# EAGLE board mainboard (EAGLE 7.4.0)
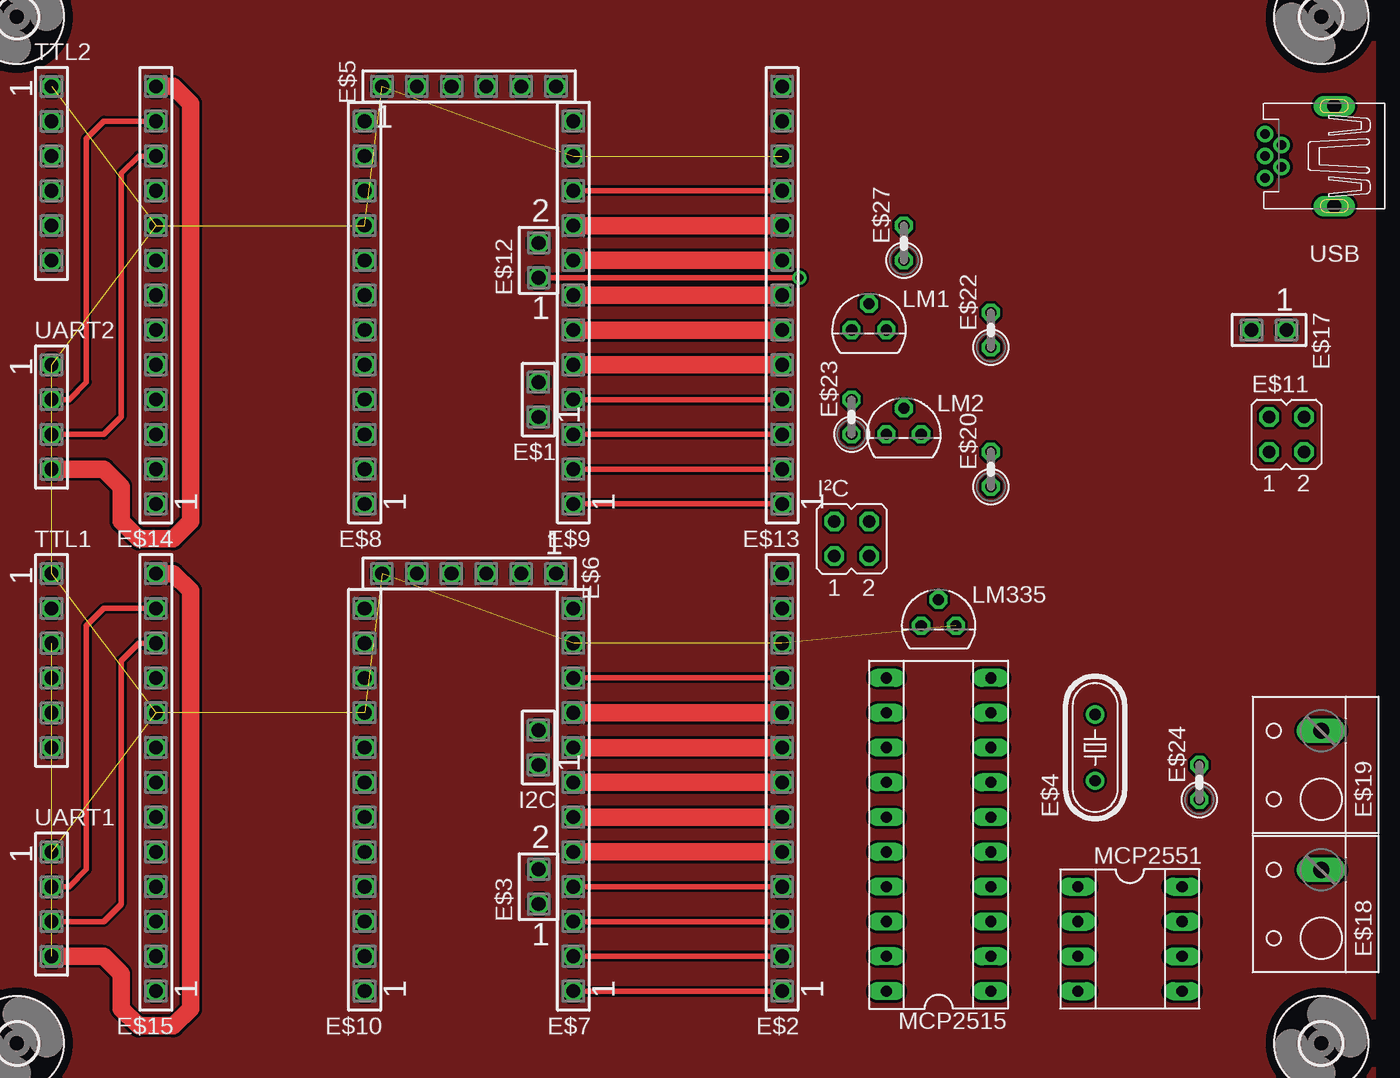
[diagram p0: board, top side]
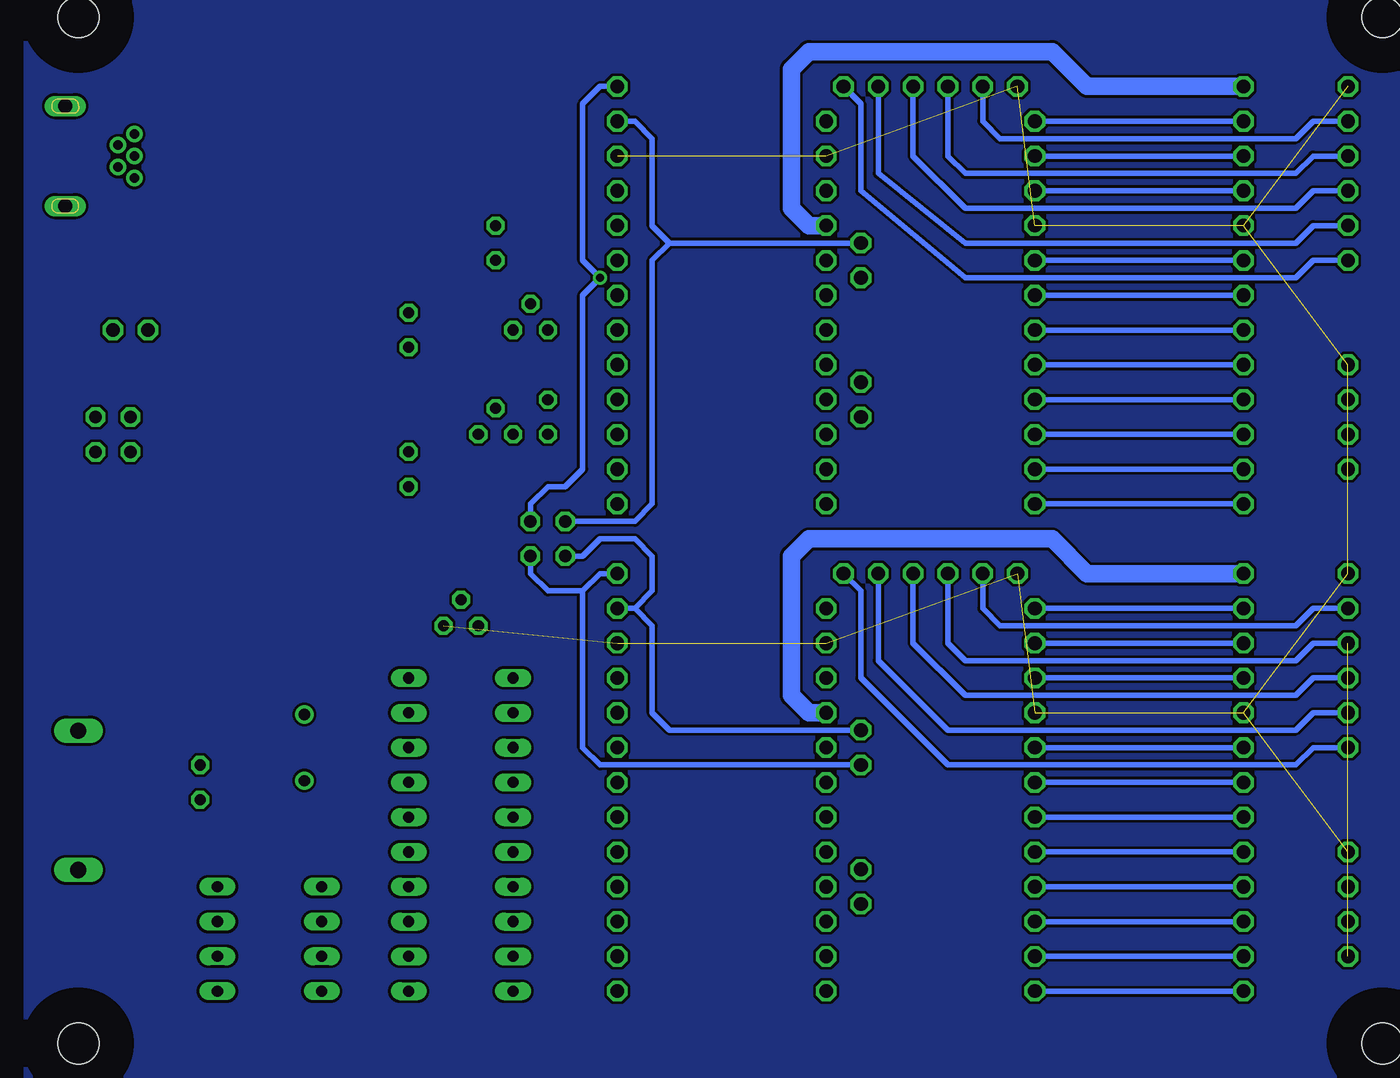
[diagram p1: board, bottom side, seen from below]

No outline drawn. Coordinates in mm, seen from the top.
Copper layers (1*16): Top 0.035mm / dielectric 1.5mm / Bottom 0.035mm
Design rules "default": minimum track width 10mil, minimum drill 24mil, track to track 8mil, track to pad 8mil, pad to pad 8mil, via to via 8mil, smd to smd 8mil, copper to edge 40mil, drill to drill 8mil, minimum pad ring 10mil, minimum via ring 8mil, stop-mask expansion 4mil, vias tented up to drill 0mil, thermal gap 10mil

## Footprints (pad centres in the part's own frame; a part is rotated, then mirrored left to right if it is on the bottom)
SSW-102-02-S-S = drill 1 pad 1.5 octagon: 1 -1.27,0; 2 1.27,0
SSW-113-02-S-S = drill 1 pad 1.5 octagon: 1 -15.24,0; 2 -12.7,0; 3 -10.16,0; 4 -7.62,0; 5 -5.08,0; 6 -2.54,0; 7 0,0; 8 2.54,0; 9 5.08,0; 10 7.62,0; 11 10.16,0; 12 12.7,0; 13 15.24,0
SSW-101-02-S-D = drill 1 pad 1.5 octagon: 1 0,-1.27; 2 0,1.27
HC49/S = drill 0.813: 1 -2.413,0; 2 2.413,0
SSW-106-02-S-S = drill 1 pad 1.5 octagon: 1 -6.35,0; 2 -3.81,0; 3 -1.27,0; 4 1.27,0; 5 3.81,0; 6 6.35,0
SSW-112-02-S-S = drill 1 pad 1.5 octagon: 1 -13.97,0; 2 -11.43,0; 3 -8.89,0; 4 -6.35,0; 5 -3.81,0; 6 -1.27,0; 7 1.27,0; 8 3.81,0; 9 6.35,0; 10 8.89,0; 11 11.43,0; 12 13.97,0
JP2Q = drill 0.914 octagon: 1 -1.27,-1.27; 2 1.27,-1.27; 3 -1.27,1.27; 4 1.27,1.27
3,0 = hole 3: 0,0
W237-112 = drill 1.194 long: 1 2.5,-1.27
0207/2V = drill 0.813 octagon: 1 -1.27,0; 2 1.27,0
TO92 = drill 0.813 pad 1.27 octagon: 1 -1.27,0; 2 0,1.905; 3 1.27,0
SOCKET-20 = drill 0.813 long: 1 -11.43,-3.81; 2 -8.89,-3.81; 3 -6.35,-3.81; 4 -3.81,-3.81; 5 -1.27,-3.81; 6 1.27,-3.81; 7 3.81,-3.81; 8 6.35,-3.81; 9 8.89,-3.81; 10 11.43,-3.81; 11 11.43,3.81; 12 8.89,3.81; 13 6.35,3.81; 14 3.81,3.81; 15 1.27,3.81; 16 -1.27,3.81; 17 -3.81,3.81; 18 -6.35,3.81; 19 -8.89,3.81; 20 -11.43,3.81
SOCKET-08 = drill 0.813 long: 1 -3.81,-3.81; 2 -1.27,-3.81; 3 1.27,-3.81; 4 3.81,-3.81; 5 3.81,3.81; 6 1.27,3.81; 7 -1.27,3.81; 8 -3.81,3.81
SSW-104-02-S-S = drill 1 pad 1.5 octagon: 1 -3.81,0; 2 -1.27,0; 3 1.27,0; 4 3.81,0
32005-601 = drill 0.7 pad 1.016: 1 2.825,1.6; 2 1.625,0.8; 3 2.825,0; 4 1.625,-0.8; 5 2.825,-1.6 | drill 1 pad 1.422 long: M1 -2.225,3.65; M2 -2.225,-3.65

## Placement (x,y rotation side)
E$1  [SSW-102-02-S-S]  41.91,50.8 90 top
E$2  [SSW-113-02-S-S]  59.69,22.86 90 top
E$3  [SSW-101-02-S-D]  41.91,15.24 0 top
E$4  16MHz  [HC49/S]  82.55,25.4 90 top
E$5  [SSW-106-02-S-S]  36.83,73.66 0 top
E$6  [SSW-106-02-S-S]  36.83,38.1 180 top
E$7  [SSW-112-02-S-S]  44.45,21.59 90 top
E$8  [SSW-112-02-S-S]  29.21,57.15 90 top
E$9  [SSW-112-02-S-S]  44.45,57.15 90 top
E$10  [SSW-112-02-S-S]  29.21,21.59 90 top
E$11  [JP2Q]  96.52,48.26 0 top
E$12  [SSW-101-02-S-D]  41.91,60.96 0 top
E$13  [SSW-113-02-S-S]  59.69,58.42 90 top
E$14  [SSW-113-02-S-S]  13.97,58.42 90 top
E$15  [SSW-113-02-S-S]  13.97,22.86 90 top
E$16  [3,0]  3.81,3.81 0 top
E$17  [SSW-102-02-S-S]  95.25,55.88 180 top
E$18  [W237-112]  97.79,13.97 90 top
E$19  [W237-112]  97.79,24.13 90 top
E$20  120R  [0207/2V]  74.93,45.72 90 top
E$21  [3,0]  3.81,78.74 0 top
E$22  120R  [0207/2V]  74.93,55.88 90 top
E$23  120R  [0207/2V]  64.77,49.53 90 top
E$24  120R  [0207/2V]  90.17,22.86 90 top
E$25  [3,0]  99.06,78.74 0 top
E$26  [3,0]  99.06,3.81 0 top
E$27  120R  [0207/2V]  68.58,62.23 90 top
I2C  [SSW-102-02-S-S]  41.91,25.4 90 top
I²C  [JP2Q]  64.77,40.64 0 top
LM1  [TO92]  66.04,55.88 0 top
LM2  [TO92]  68.58,48.26 0 top
LM335  [TO92]  71.12,34.29 0 top
MCP2515  [SOCKET-20]  71.12,19.05 90 top
MCP2551  [SOCKET-08]  85.09,11.43 270 top
TTL1  [SSW-106-02-S-S]  6.35,31.75 270 top
TTL2  [SSW-106-02-S-S]  6.35,67.31 270 top
UART1  [SSW-104-02-S-S]  6.35,13.97 270 top
UART2  [SSW-104-02-S-S]  6.35,49.53 270 top
USB  [32005-601]  97.79,68.58 180 top

## Library data of the parts
E$1-E$3 E$5-E$10 E$12-E$15 E$17 I2C TTL1 TTL2 UART1 UART2 = con-samtec
E$4 = crystal
E$11 I²C = jumper
E$16 E$21 E$25 E$26 = holes
E$18 E$19 = con-wago-500
E$20 E$22-E$24 E$27 = rcl
LM1 LM2 LM335 = national-semiconductor
MCP2515 MCP2551 = ic-package
USB = con-cypressindustries

## Nets
GND: E$2.11 E$5.1 E$6.6 E$7.11 E$8.9 E$9.11 E$10.9 E$13.11 E$14.9 E$15.9 LM335.3 TTL1.1 TTL2.1 UART1.1 UART2.1
POWER1: E$2.9 E$6.4 E$7.9 E$15.13 TTL1.3 UART1.4
S$1: E$10.1 E$15.1
S$2: E$10.2 E$15.2
S$3: E$10.3 E$15.3
S$4: E$10.4 E$15.4
S$5: E$10.5 E$15.5
S$6: E$10.6 E$15.6
S$7: E$5.2 TTL2.2
S$8: E$10.8 E$15.8
S$9: E$5.3 TTL2.3
S$10: E$10.10 E$15.10
S$11: E$10.11 E$15.11 UART1.3
S$12: E$10.12 E$15.12 UART1.2
S$13: E$5.4 TTL2.4
S$14: E$5.5 TTL2.5
S$15: E$2.10 E$7.10
S$16: E$2.5 E$7.5
S$17: E$2.8 E$7.8
S$18: E$2.7 E$7.7
S$19: E$2.6 E$7.6
S$20: E$10.7 E$15.7
S$21: E$2.4 E$7.4
S$22: E$2.3 E$7.3
S$23: E$2.2 E$7.2
S$24: E$2.1 E$7.1
S$25: E$6.5 TTL1.2
S$26: E$8.1 E$14.1
S$27: E$8.2 E$14.2
S$28: E$8.3 E$14.3
S$29: E$8.4 E$14.4
S$30: E$8.5 E$14.5
S$31: E$8.6 E$14.6
S$32: E$8.7 E$14.7
S$33: E$8.8 E$14.8
S$34: E$5.6 TTL2.6
S$35: E$8.10 E$14.10
S$36: E$8.11 E$14.11 UART2.3
S$37: E$8.12 E$14.12 UART2.2
S$40: E$9.8 E$13.8
S$41: E$9.9 E$13.9 E$14.13 UART2.4
S$42: E$9.10 E$13.10
S$43: E$9.7 E$13.7
S$44: E$9.6 E$13.6
S$45: E$9.5 E$13.5
S$46: E$9.4 E$13.4
S$47: E$9.3 E$13.3
S$48: E$9.2 E$13.2
S$49: E$9.1 E$13.1
S$51: E$6.3 TTL1.4
S$52: E$6.2 TTL1.5
S$53: E$6.1 TTL1.6
S$54: E$2.12 I2C.2 I²C.1
S$55: E$2.13 I2C.1 I²C.2
S$56: E$12.2 E$13.12 I²C.3
S$57: E$12.1 E$13.13 I²C.4

## Tracks (layer width: path | path; a pad name or v marks a point on that pad's centre or on a via)
GND  (14 unrouted)
POWER1  (1 unrouted)
  Top 1.27: E$7.9 E$2.9 | E$15.13 15.24,38.1 16.51,36.83 16.51,6.35 15.24,5.08 12.7,5.08 11.43,6.35 11.43,8.89 10.16,10.16 UART1.4
  Bottom 0.406: E$6.4 35.56,33.02 34.29,31.75 10.16,31.75 8.89,33.02 TTL1.3
  Bottom 1.27: E$7.9 45.72,27.94 46.99,29.21 46.99,39.37 45.72,40.64 27.94,40.64 25.4,38.1 E$15.13
S$1
  Bottom 0.406: E$10.1 E$15.1
S$2
  Bottom 0.406: E$15.2 E$10.2
S$3
  Bottom 0.406: E$10.3 E$15.3
S$4
  Bottom 0.406: E$15.4 E$10.4
S$5
  Bottom 0.406: E$10.5 E$15.5
S$6
  Bottom 0.406: E$15.6 E$10.6
S$7
  Bottom 0.406: E$5.2 33.02,71.12 31.75,69.85 10.16,69.85 8.89,71.12 TTL2.2
S$8
  Bottom 0.406: E$15.8 E$10.8
S$9
  Bottom 0.406: E$5.3 35.56,68.58 34.29,67.31 10.16,67.31 8.89,68.58 TTL2.3
S$10
  Bottom 0.406: E$15.10 E$10.10
S$11
  Top 0.406: E$15.11 12.7,33.02 11.43,31.75 11.43,13.97 10.16,12.7 UART1.3
  Bottom 0.406: E$10.11 E$15.11
S$12
  Top 0.406: E$15.12 10.16,35.56 8.89,34.29 8.89,16.51 7.62,15.24 UART1.2
  Bottom 0.406: E$15.12 E$10.12
S$13
  Bottom 0.406: E$5.4 38.1,68.58 34.29,64.77 10.16,64.77 8.89,66.04 TTL2.4
S$14
  Bottom 0.406: E$5.5 40.64,67.31 34.29,62.23 10.16,62.23 8.89,63.5 TTL2.5
S$15
  Top 0.406: E$2.10 E$7.10
S$16
  Top 1.27: E$7.5 E$2.5
S$17
  Top 1.27: E$2.8 E$7.8
S$18
  Top 1.27: E$7.7 E$2.7
S$19
  Top 1.27: E$2.6 E$7.6
S$20
  Bottom 0.406: E$15.7 E$10.7
S$21
  Top 0.406: E$2.4 E$7.4
S$22
  Top 0.406: E$7.3 E$2.3
S$23
  Top 0.406: E$2.2 E$7.2
S$24
  Top 0.406: E$7.1 E$2.1
S$25
  Bottom 0.406: E$6.5 33.02,35.56 31.75,34.29 10.16,34.29 8.89,35.56 TTL1.2
S$26
  Bottom 0.406: E$14.1 E$8.1
S$27
  Bottom 0.406: E$14.2 E$8.2
S$28
  Bottom 0.406: E$8.3 E$14.3
S$29
  Bottom 0.406: E$14.4 E$8.4
S$30
  Bottom 0.406: E$8.5 E$14.5
S$31
  Bottom 0.406: E$14.6 E$8.6
S$32
  Bottom 0.406: E$8.7 E$14.7
S$33
  Bottom 0.406: E$14.8 E$8.8
S$34
  Bottom 0.406: E$5.6 41.91,72.39 41.91,66.04 34.29,59.69 10.16,59.69 8.89,60.96 TTL2.6
S$35
  Bottom 0.406: E$14.10 E$8.10
S$36
  Top 0.406: UART2.3 10.16,48.26 11.43,49.53 11.43,67.31 12.7,68.58 E$14.11
  Bottom 0.406: E$8.11 E$14.11
S$37
  Top 0.406: UART2.2 7.62,50.8 8.89,52.07 8.89,69.85 10.16,71.12 E$14.12
  Bottom 0.406: E$14.12 E$8.12
S$38
  pour Top: 0,0 0,82.55 102.87,82.55 102.87,0
S$39
  pour Bottom: 0,82.55 102.87,82.55 102.87,0 0,0
S$40
  Top 1.27: E$13.8 E$9.8
S$41
  Top 1.27: E$9.9 E$13.9 | E$14.13 15.24,73.66 16.51,72.39 16.51,41.91 15.24,40.64 12.7,40.64 11.43,41.91 11.43,44.45 10.16,45.72 UART2.4
  Bottom 1.27: E$14.13 25.4,73.66 27.94,76.2 45.72,76.2 46.99,74.93 46.99,64.77 45.72,63.5 E$9.9
S$42
  Top 0.406: E$13.10 E$9.10
S$43
  Top 1.27: E$13.7 E$9.7
S$44
  Top 1.27: E$9.6 E$13.6
S$45
  Top 1.27: E$13.5 E$9.5
S$46
  Top 0.406: E$9.4 E$13.4
S$47
  Top 0.406: E$13.3 E$9.3
S$48
  Top 0.406: E$9.2 E$13.2
S$49
  Top 0.406: E$13.1 E$9.1
S$51
  Bottom 0.406: TTL1.4 8.89,30.48 10.16,29.21 34.29,29.21 38.1,33.02 E$6.3
S$52
  Bottom 0.406: E$6.2 40.64,31.75 35.56,26.67 10.16,26.67 8.89,27.94 TTL1.5
S$53
  Bottom 0.406: E$6.1 41.91,36.83 41.91,30.48 35.56,24.13 10.16,24.13 8.89,25.4 TTL1.6
S$54
  Bottom 0.406: 58.42,35.56 57.15,36.83 57.15,39.37 58.42,40.64 60.96,40.64 62.23,39.37 I²C.1 | I2C.2 55.88,26.67 57.15,27.94 57.15,34.29 58.42,35.56 | 58.42,35.56 E$2.12
S$55
  Bottom 0.406: 62.23,36.83 64.77,36.83 66.04,38.1 I²C.2 | I2C.1 60.96,24.13 62.23,25.4 62.23,36.83 | 62.23,36.83 60.96,38.1 E$2.13
S$56
  Bottom 0.406: 55.88,62.23 57.15,60.96 57.15,43.18 58.42,41.91 I²C.3 | 55.88,62.23 57.15,63.5 57.15,69.85 58.42,71.12 E$13.12 | E$12.2 55.88,62.23
S$57  (via drill 0.6)
  Top 0.406: E$12.1 v60.96,59.69
  Bottom 0.406: E$13.13 60.96,73.66 62.23,72.39 62.23,60.96 v60.96,59.69 62.23,58.42 62.23,45.72 63.5,44.45 64.77,44.45 66.04,43.18 I²C.4